# Altium PCB PowerModule_PCBDesign.PcbDoc
Units mm, origin at the board's own origin, x right, y up, seen from the top; angles counter-clockwise.
Board outline 110 x 70 mm, 4 copper layers (Top Layer, Internal Plane 1, Internal Plane 2, Bottom Layer); 32 components, 31 nets, 100 pads, 0 vias.
Unrouted connection lines stored in the file: 9.
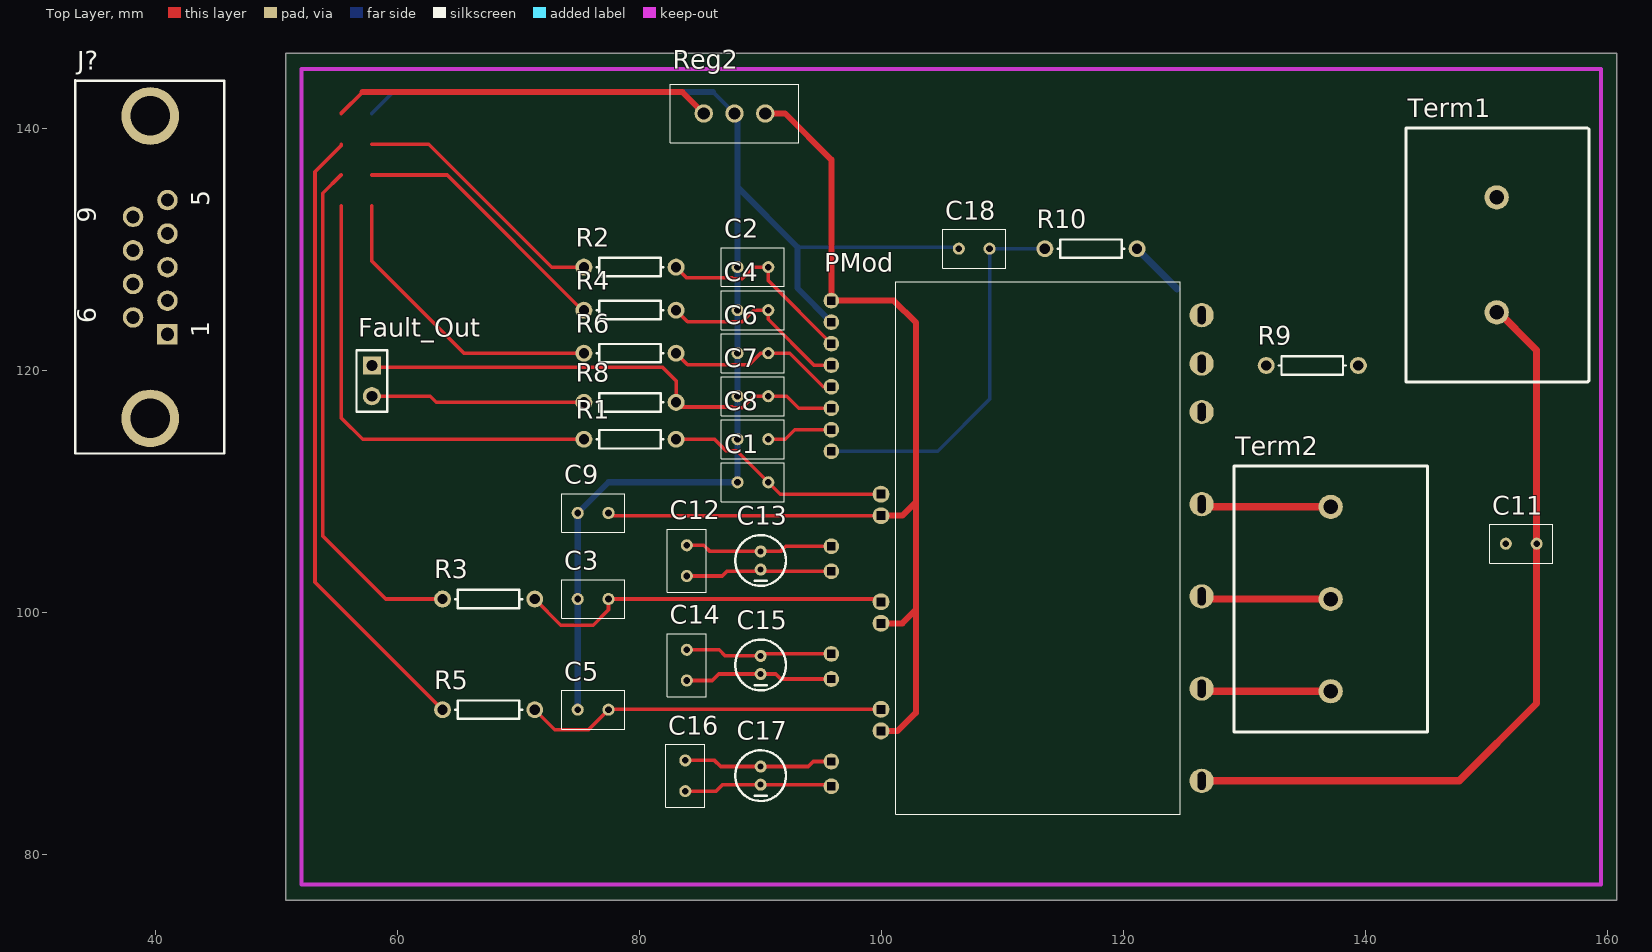
[diagram p0: Top Layer view]
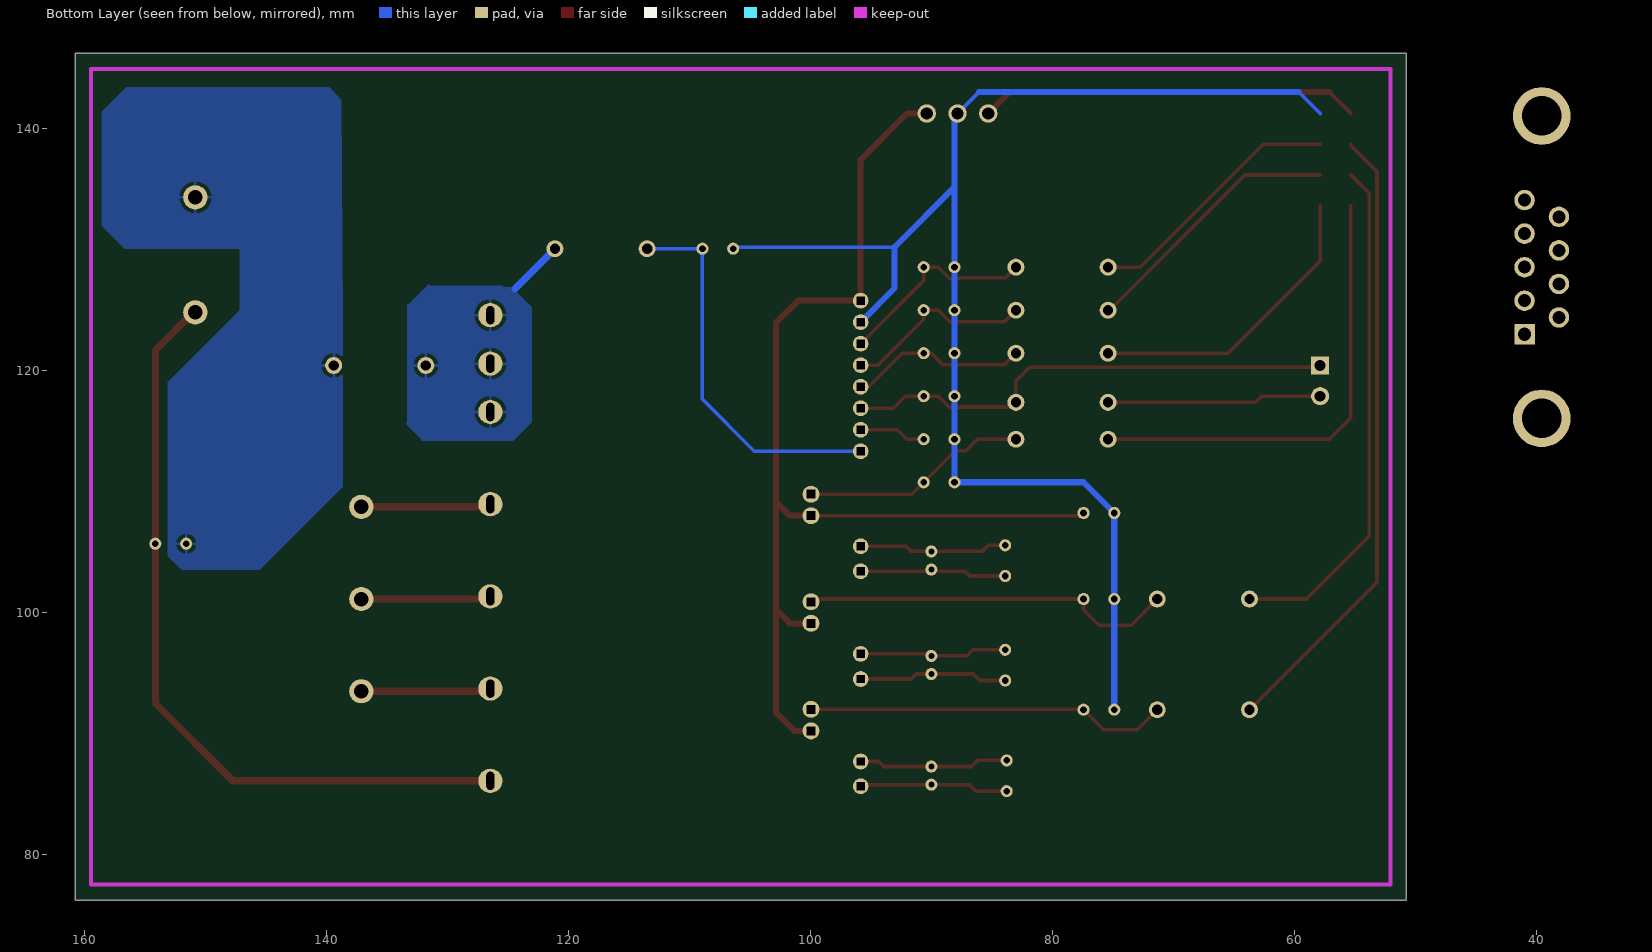
[diagram p1: Bottom Layer view, seen from below]
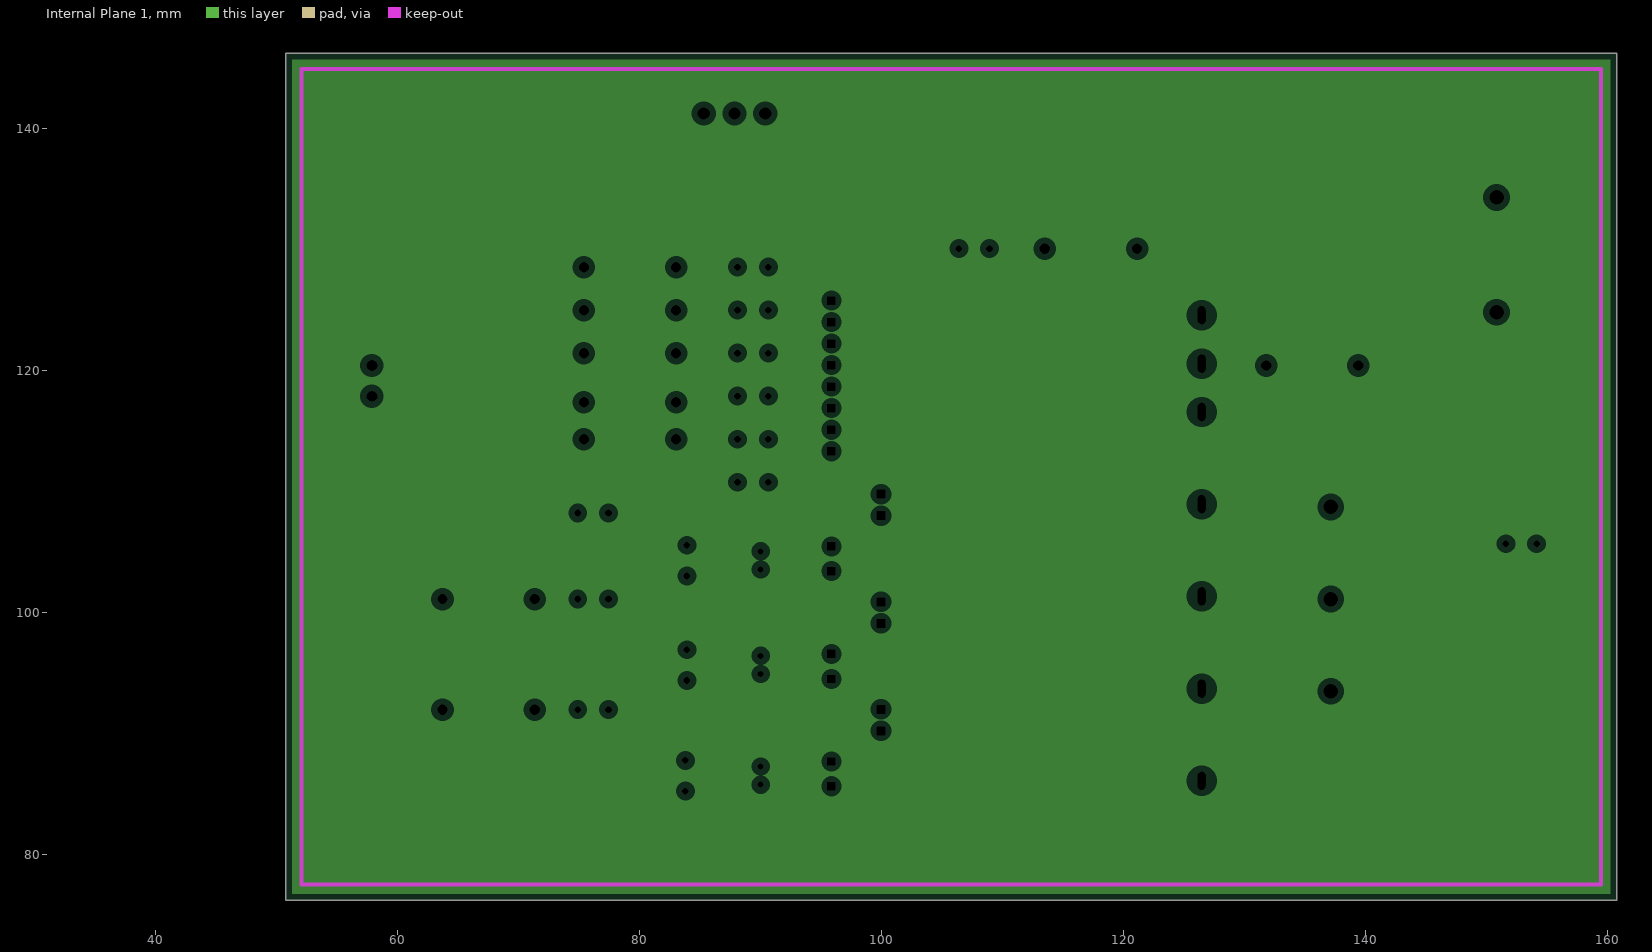
[diagram p2: Internal Plane 1, clearances drawn from the general rule]
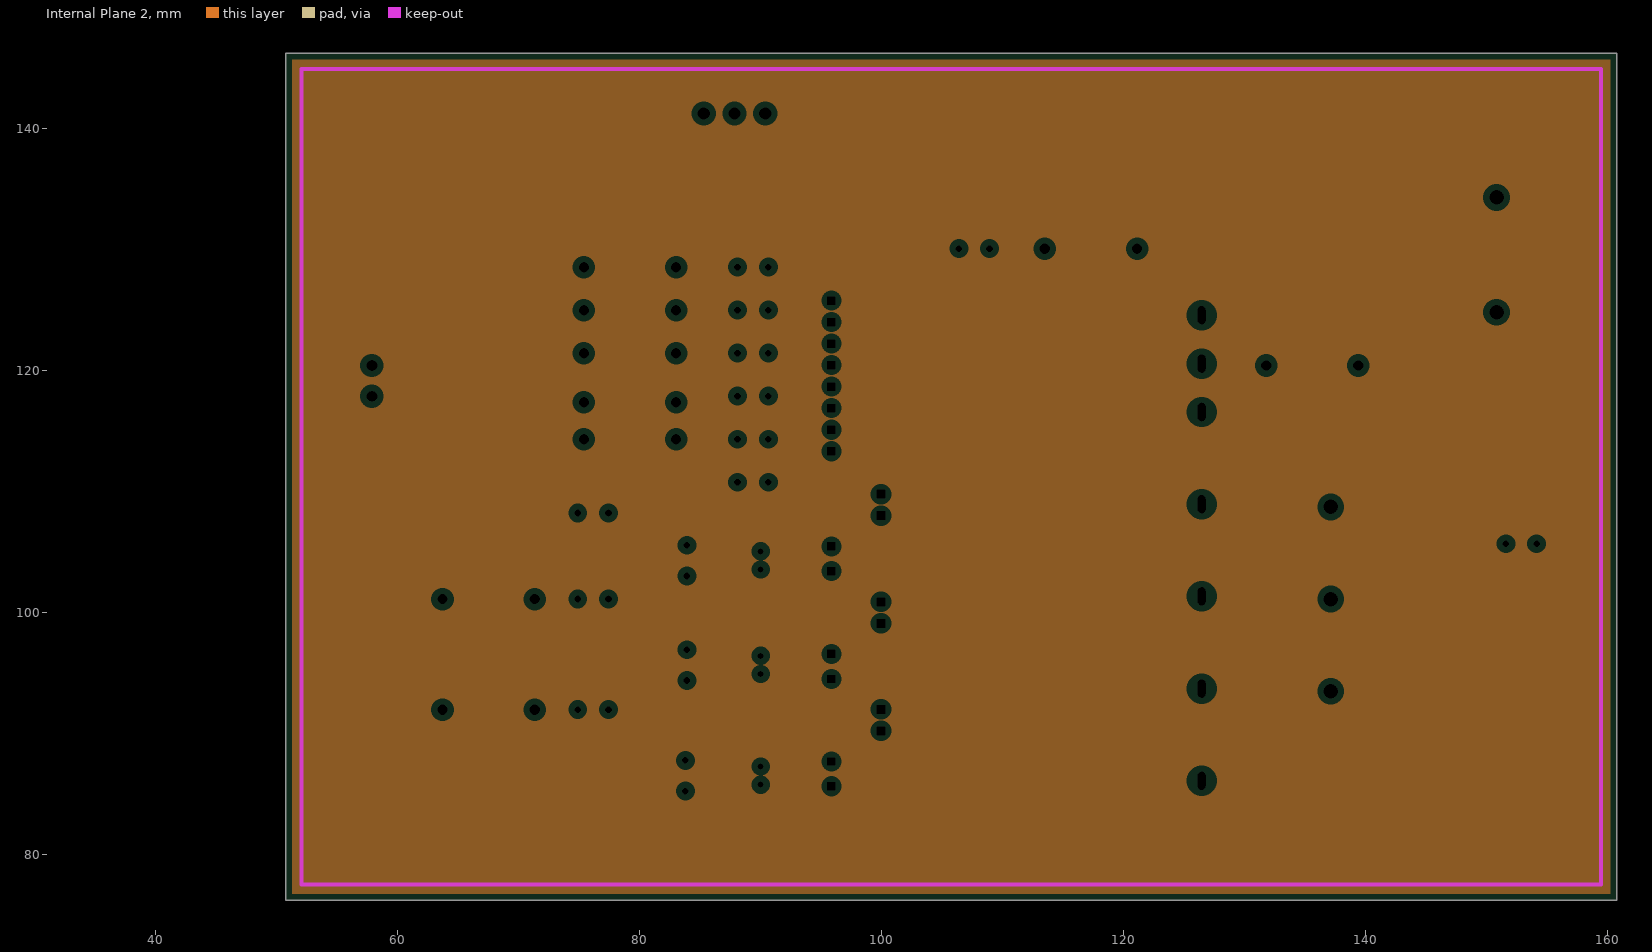
[diagram p3: Internal Plane 2, clearances drawn from the general rule]

## Layer stack, top to bottom
Top Layer: signal copper 0.0356
Dielectric: dielectric 0.32, FR-4, Dk 4.8
Internal Plane 1: plane copper 0.0356
Dielectric: dielectric 0.32, FR-4, Dk 4.8
Internal Plane 2: plane copper 0.0356
Dielectric: dielectric 0.32, FR-4, Dk 4.8
Bottom Layer: signal copper 0.0356

## Board outline
50.8,76.2 160.8,76.2 160.8,146.2 50.8,146.2

## Design rules (kind name [scope] priority, off if disabled: settings)
Clearance [All] p1: gap=0.3
PlaneClearance [All] p1: clearance=0.508
PlaneConnect [All] p1: planeconnectstyle=Relief reliefexpansion=0.508 reliefentries=4 reliefconductorwidth=0.254 reliefairgap=0.254
PolygonConnect [All] p1: connectstyle=Relief reliefconductorwidth=0.254 reliefentries=4 polygonreliefangle="90 Angle"
RoutingVias [All] p1: holewidth=0.8 width=1.6 viastyle="Through Hole" minholewidth=0.711 minwidth=1.27 maxholewidth=0.711 maxwidth=1.27
SilkscreenOverComponentPads [All] p1: minsilkscreentomaskgap=0.254
SolderMaskExpansion [All] p1: expansion=0.102
Width [All] p1: maxlimit=0.6 minlimit=0.3 preferedwidth=0.3 minimp=50.000000 maximp=50.000000 favimp=50.000000
25 further rules are at their usual default settings.

## Components (designator, comment, footprint, x,y, rotation, side; value= is the part's Value field where it differs from the comment)
C1 "Cap" NPolar_Cap 89.408,110.744 r0 top
C2 "Cap" NPolar_Cap 89.408,128.524 r0 top
C3 "Cap" NPolar_Cap 76.2,101.092 r0 top
C4 "Cap" NPolar_Cap 89.408,124.968 r0 top
C5 "Cap" NPolar_Cap 76.2,91.948 r0 top
C6 "Cap" NPolar_Cap 89.408,121.412 r0 top
C7 "Cap" NPolar_Cap 89.408,117.856 r0 top
C8 "Cap" NPolar_Cap 89.408,114.3 r0 top
C9 "Cap" NPolar_Cap 76.2,108.204 r0 top
C11 "Cap" NPolar_Cap 152.908,105.664 r0 top
C12 "Cap" NPolar_Cap 83.947,104.267 r90 top
C13 "Cap2" Polar_Cap 90.043,105.029 r270 top
C14 "Cap" NPolar_Cap 83.947,95.631 r90 top
C15 "Cap2" Polar_Cap 90.043,96.393 r270 top
C16 "Cap" NPolar_Cap 83.82,86.487 r90 top
C17 "Cap2" Polar_Cap 90.043,87.249 r270 top
C18 "Cap" NPolar_Cap 107.696,130.048 r0 top
Fault_Out "Header 2" HDR1X2 57.912,120.396 r270 top
J? "D Connector 9" DSUB1.385-2H9 39.624,128.524 r90 top
PMod "FSBB15CH60C" FSBB20CH60F 126.492,83.312 r90 top
R1 "Res1" AXIAL-0.3 79.248,114.3 r0 top
R2 "Res1" AXIAL-0.3 79.248,128.524 r0 top
R3 "Res1" AXIAL-0.3 67.564,101.092 r0 top
R4 "Res1" AXIAL-0.3 79.248,124.968 r0 top
R5 "Res1" AXIAL-0.3 67.564,91.948 r0 top
R6 "Res1" AXIAL-0.3 79.248,121.412 r0 top
R8 "Res1" AXIAL-0.3 79.248,117.348 r180 top
R9 "Res1" AXIAL-0.3 135.636,120.396 r180 top
R10 "Res1" AXIAL-0.3 117.348,130.048 r0 top
Reg2 "U7800" U7800 85.344,141.224 r0 top
Term1 "Terminal Block 2P" "Terminal Block 2 Pin" 150.876,129.54 r90 top
Term2 "Terminal Block 3P" "Terminal Block 3 Pin" 137.16,101.092 r270 top

## Footprints (in the part's own frame and the unit in brackets; to place one, negate y for a bottom-side part, rotate by r counter-clockwise, add the part's x,y. Pads: shape width x height; smd on the part's side, far side on the other; paste and mask are expansions set on the pad)
AXIAL-0.3 [mm] "Axial Device, Thru-Hole; 2 Leads; 0.3 in Pin Spacing"
  round 1.4 hole 0.85: 1(-3.81,0) 2(3.81,0)
  silkscreen extent -2.77,-0.76 2.77,0.76
DSUB1.385-2H9 [mm] "Connector; D Subminiature; 9 Position; Right Angle; Pitch 1.385 mm"
  rect 1.69x1.69 hole 1.09: 1(-5.54,-1.395)
  round 1.69 hole 1.09: 2(-2.77,-1.395) 3(0,-1.395) 4(2.77,-1.395) 5(5.54,-1.395) 6(-4.155,1.445) 7(-1.385,1.445) 8(1.385,1.445) 9(4.155,1.445)
  round 4.76 hole 3.26: 10(-12.495,0.025) 11(12.495,0.025)
  silkscreen extent -15.4,-6.09 15.43,6.22
FSBB20CH60F [mm]
  round 1.3 hole 0.65 square: 1(42.447,30.6) 2(40.669,30.6) 3(38.891,30.6) 4(37.113,30.6) 5(35.335,30.6) 6(33.557,30.6) 7(31.779,30.6) 8(30,30.6) 11(22.136,30.6) 12(20.086,30.6) 15(13.246,30.6) 16(11.169,30.6) 19(4.356,30.6) 20(2.306,30.6)
  round 1.4 hole 0.7 square: 9(26.445,26.5) 10(24.667,26.5) 13(17.555,26.5) 14(15.777,26.5) 17(8.665,26.5) 18(6.887,26.5)
  round 2 hole 0.65 slot 1.5 at 0 deg: 21(41.24,0) 22(37.24,0) 23(33.24,0) 24(25.62,0) 25(18,0) 26(10.38,0) 27(2.76,0)
  silkscreen extent 0,1.78 44,25.27
HDR1X2 [mm] "Connector; Header; 2 Position"
  rect 1.5x1.5 hole 0.9: 1(0,0)
  round 1.5 hole 0.9: 2(2.54,0)
  silkscreen extent -1.27,-1.27 3.81,1.27
NPolar_Cap [mm]
  round 1 hole 0.55: 1(-1.27,0) 2(1.27,0)
  silkscreen extent -2.6,-1.6 2.6,1.6
Polar_Cap [mm]
  round 1 hole 0.5: 1(0,0) 2(1.5,0)
  silkscreen extent -1.35,-2.1 2.85,2.1
"Terminal Block 2 Pin" [mm]
  round 2 hole 1.2: 1(-4.75,0) 2(4.75,0)
  silkscreen extent -10.5,-7.62 10.5,7.5
"Terminal Block 3 Pin" [mm]
  round 2 hole 1.2: 1(-7.62,0) 2(0,0) 3(7.62,0)
  silkscreen extent -11,-8 11,8
U7800 [mil]
  round 60 hole 39.37: 1(0,0) 2(100,0) 3(200,0)
  silkscreen extent -109,-94 309,94

## Part data
C1 C2 C3 C4 C5 C6 C7 C8 C9 C11 C12 C13 C14 C15 C16 C17 C18: "Capacitor"
Fault_Out: "Header, 2-Pin"
J?: "Receptacle Assembly, 9 Position, Right Angle"
R1 R2 R3 R4 R5 R6 R8 R9 R10: "Resistor"

## Nets (pads, with @x,y where several pads share a name; then routed paths per layer and width w, separated by ;. In a path a pad name is that pad's centre, name@x,y a point inside that pad or via, vN(x,y) a via of type N, cw(c..) or ccw(c..) an arc to the next point about the centre after c; other vN are vias at no path point)
5V: Fault_Out.2 R8.2 | length 17.7
  Top Layer w0.3: Fault_Out.2 62.738,117.856 63.246,117.348 R8.2
15V: C9.2 PMod.1 PMod.10 PMod.14 PMod.18 Reg2.3 | length 91.5
  Top Layer w0.3: C9.2 77.695,107.979 PMod.10
  Top Layer w0.5: Reg2.3 92.075,141.224 95.892,137.407 PMod.1 101.063,125.759 102.87,123.952 102.87,109.093 ; PMod.18 101.375,90.199 102.87,91.694 102.87,100.203 ; PMod.14 101.756,99.089 102.87,100.203 ; PMod.10 101.756,107.979 102.87,109.093 ; 102.87,100.203 102.87,109.093
24V: Fault_Out.1 Reg2.1 | length 31.4
  Top Layer w0.3: 55.372,141.224 57.15,143.002
  Top Layer w0.5: 57.15,143.002 83.566,143.002 Reg2.1
CSC: C18.2 PMod.8 R10.1 | length 31.9
  Bottom Layer w0.3: PMod.8 104.676,113.312 108.966,117.602 C18.2 R10.1
DGND: C1.1 C2.1 C3.1 C4.1 C5.1 C6.1 C7.1 C8.1 C9.1 C18.1 J?.7 PMod.2 Reg2.2 | length 119.9
  Bottom Layer w0.3: 57.912,141.224 59.69,143.002 ; 86.106,143.002 Reg2.2 Reg2.2@88.138,140.97 ; 93.091,130.175 C18.1@106.045,130.175
  Bottom Layer w0.5: 59.69,143.002 86.106,143.002 ; C5.1 C3.1 C9.1 77.47,110.744 C1.1 C8.1 C7.1 C6.1 C4.1 C2.1 88.138,135.128 ; Reg2.2@88.138,140.97 88.138,135.128 ; PMod.2 93.091,126.782 93.091,130.175 88.138,135.128
FO: C7.2 J?.9 PMod.6 R8.1 | length 41.3
  Top Layer w0.3: 57.912,120.396 58.046,120.262 81.922,120.262 83.058,119.126 R8.1 83.439,116.967 87.683,116.967 87.744,116.906 88.532,116.906 89.482,117.856 C7.2 92.202,117.856 93.189,116.869 PMod.6
NetC8_2: C8.2 PMod.7 | length 5.5
  Top Layer w0.3: C8.2 92.075,114.3 92.866,115.091 PMod.7
NetPMod_21: PMod.21 PMod.22 PMod.23 R9.2 R10.2 | length 4.7
  Bottom Layer w0.6: R10.2 124.46,126.746
PGND: C11.1 R9.1 Term1.2
UH: J?.3 R1.1 | length 38.3
  Top Layer w0.3: 55.372,133.604 55.372,116.078 57.15,114.3 R1.1
UH': C1.2 PMod.9 R1.2 | length 18.8
  Top Layer w0.3: R1.2 86.238,114.3 87.188,113.35 88.072,113.35 C1.2 91.665,109.757 PMod.9
UL: J?.2 R2.1 | length 21.7
  Top Layer w0.3: 57.912,138.684 62.611,138.684 72.771,128.524 R2.1
UL': C2.2 PMod.3 R2.2 | length 16.9
  Top Layer w0.3: R2.2 83.947,127.635 87.683,127.635 87.744,127.574 88.532,127.574 89.482,128.524 C2.2 90.678,127.417 PMod.3
UOUT: PMod.24 Term2.1 | length 10.8
  Top Layer w0.6: PMod.24@126.365,108.712 Term2.1
V_DC: C11.2 PMod.27 Term1.1 | length 64.5
  Top Layer w0.6: PMod.27 147.794,86.072 154.178,92.456 C11.2 ; Term1.1@150.749,125.095 154.178,121.666 C11.2 ; C11.2@154.178,105.791 C11.2
VB(U): C12.2 C13.1 PMod.11 | length 12.3
  Top Layer w0.3: C12.2 85.344,105.537 85.852,105.029 C13.1 91.694,105.029 92.113,105.448 PMod.11
VB(V): C14.2 C15.1 PMod.15 | length 12.2
  Top Layer w0.3: C14.2 86.614,96.901 87.122,96.393 C15.1 90.208,96.558 PMod.15
VB(W): C16.2 C17.1 PMod.19 | length 12.5
  Top Layer w0.3: C16.2 86.233,87.757 86.741,87.249 C17.1 93.98,87.249 94.399,87.668 PMod.19
VH: J?.8 R3.1 | length 42.5
  Top Layer w0.3: 55.372,136.144 53.848,134.62 53.848,106.299 59.055,101.092 R3.1
VH': C3.2 PMod.13 R3.2 | length 31
  Top Layer w0.3: R3.2 73.533,98.933 76.2,98.933 77.47,100.203 C3.2 99.767,101.092 PMod.13
VL: J?.6 R4.1 | length 22.2
  Top Layer w0.3: 57.912,136.144 64.135,136.144 75.311,124.968 R4.1
VL': C4.2 PMod.4 R4.2 | length 15.9
  Top Layer w0.3: R4.2 84.008,124.018 88.532,124.018 89.482,124.968 C4.2 90.678,124.206 94.459,120.425 PMod.4
VOUT: PMod.25 Term2.2 | length 11
  Top Layer w0.3: PMod.25@126.712,101.092 PMod.25 PMod.25@126.78,101.6
  Top Layer w0.6: PMod.25@126.873,101.092 Term2.2
VS(U): C12.1 C13.2 PMod.12 | length 12.1
  Top Layer w0.3: C12.1 86.868,102.997 87.269,103.398 PMod.12
VS(V): C14.1 C15.2 PMod.16 | length 12.3
  Top Layer w0.3: C14.1 86.058,94.361 86.59,94.893 C15.2 91.289,94.893 91.701,94.481 PMod.16
VS(W): C16.1 C17.2 PMod.20 | length 12.2
  Top Layer w0.3: C16.1 86.36,85.217 86.892,85.749 C17.2 PMod.20@95.761,85.749
WH: J?.4 R5.1 | length 52
  Top Layer w0.3: 55.372,138.684 55.372,138.557 53.213,136.398 53.213,102.489 R5.1
WH': C5.2 PMod.17 R5.2 | length 30
  Top Layer w0.3: R5.2 73.025,90.297 75.819,90.297 C5.2 ; C5.2@77.499,91.977 PMod.17
WL: J?.1 R6.1 | length 25.3
  Top Layer w0.3: 57.912,133.604 57.912,129.032 65.532,121.412 R6.1
WL': C6.2 PMod.5 R6.2 | length 14.8
  Top Layer w0.3: R6.2 84.008,120.462 89.088,120.462 90.038,121.412 C6.2 92.456,121.412 95.221,118.647 PMod.5
WOUT: PMod.26 Term2.3 | length 10.5
  Top Layer w0.6: PMod.26@126.619,93.472 Term2.3
pads on no net: J?.5 J?.10 J?.11

## Polygon pours and split planes (outlines as drawn)
PGND on Bottom Layer "Bottom Layer-NETPMod_21" (solid, pour order 1000): 138.684,124.333 138.684,115.443 138.684,110.363 145.415,103.632 145.542,103.505 152.019,103.505 153.035,104.521 153.162,104.648 153.162,118.999 147.193,124.968 147.193,130.048 156.718,130.048 158.623,131.953 158.623,141.351 157.099,142.875 156.591,143.383 140.081,143.383 139.827,143.383 138.811,142.367
NetPMod_21 on Bottom Layer "Bottom Layer-NETPMod_21" (solid, pour order 1001): 125.476,126.873 124.714,126.873 123.063,125.222 123.063,115.697 124.587,114.173 132.207,114.173 132.207,114.3 133.477,115.57 133.35,115.697 133.35,125.476 133.223,125.476 131.572,127.127 131.445,127 124.968,127
no net on Internal Plane 1 (split plane): 160.29,76.71 51.31,76.71 51.31,145.69 160.29,145.69
no net on Internal Plane 2 (split plane): 160.29,76.71 51.31,76.71 51.31,145.69 160.29,145.69

## Keep-outs
Keep-Out Layer:
  lines w0.3: 52.1,77.5 52.1,144.9 159.5,144.9 159.5,77.5 52.1,77.5

## Silkscreen, mask and mechanical layers (free items; w line width, h text height)
Drill Drawing:
  text ".LEGEND" at 165.88,81.28 h1.52
  text "Drill Drawing." at 165.88,78.74 h1.52

## Dimensions
52.1,77.5 to 52.1,144.9 on Mechanical 1
52.1,77.5 to 159.5,77.5 on Mechanical 1

## Text inside footprints (layer, text, board x,y; h text height)
J?: Top Overlay "6" at 35.074,123.869 h1.5 r90; Top Overlay "9" at 35.074,132.179 h1.5 r90; Top Overlay "5" at 44.474,133.564 h1.5 r90; Top Overlay "1" at 44.474,122.734 h1.5 r90